# Allegro board CUITBIKE_V1.1_RF.brd
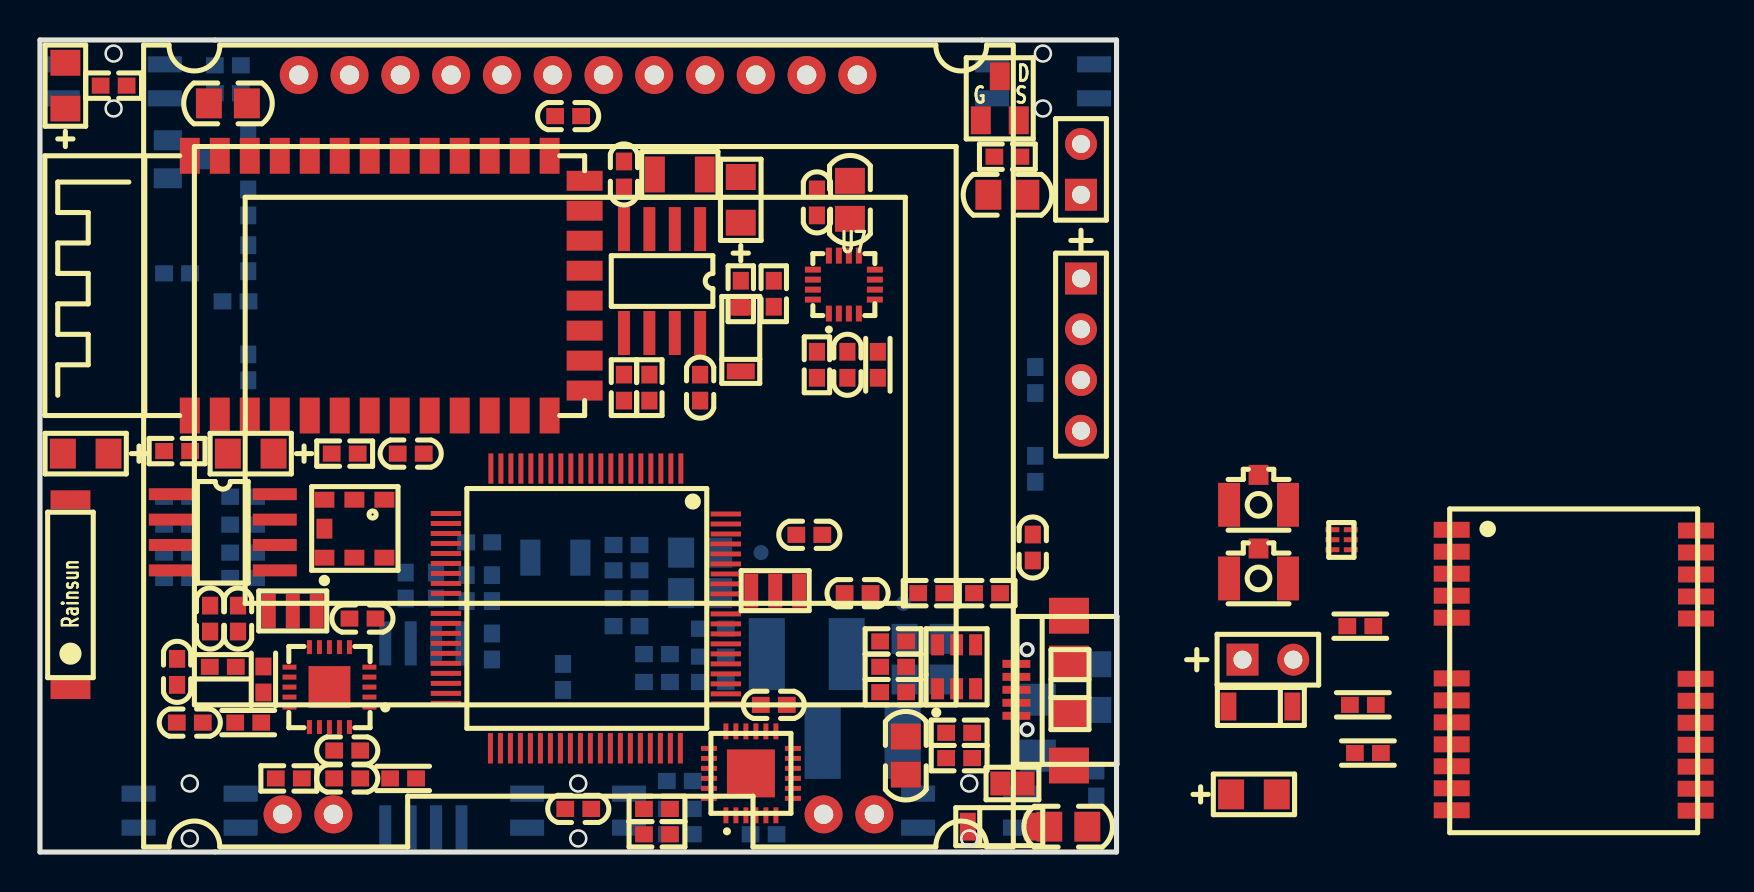
[diagram p0: board, top side]
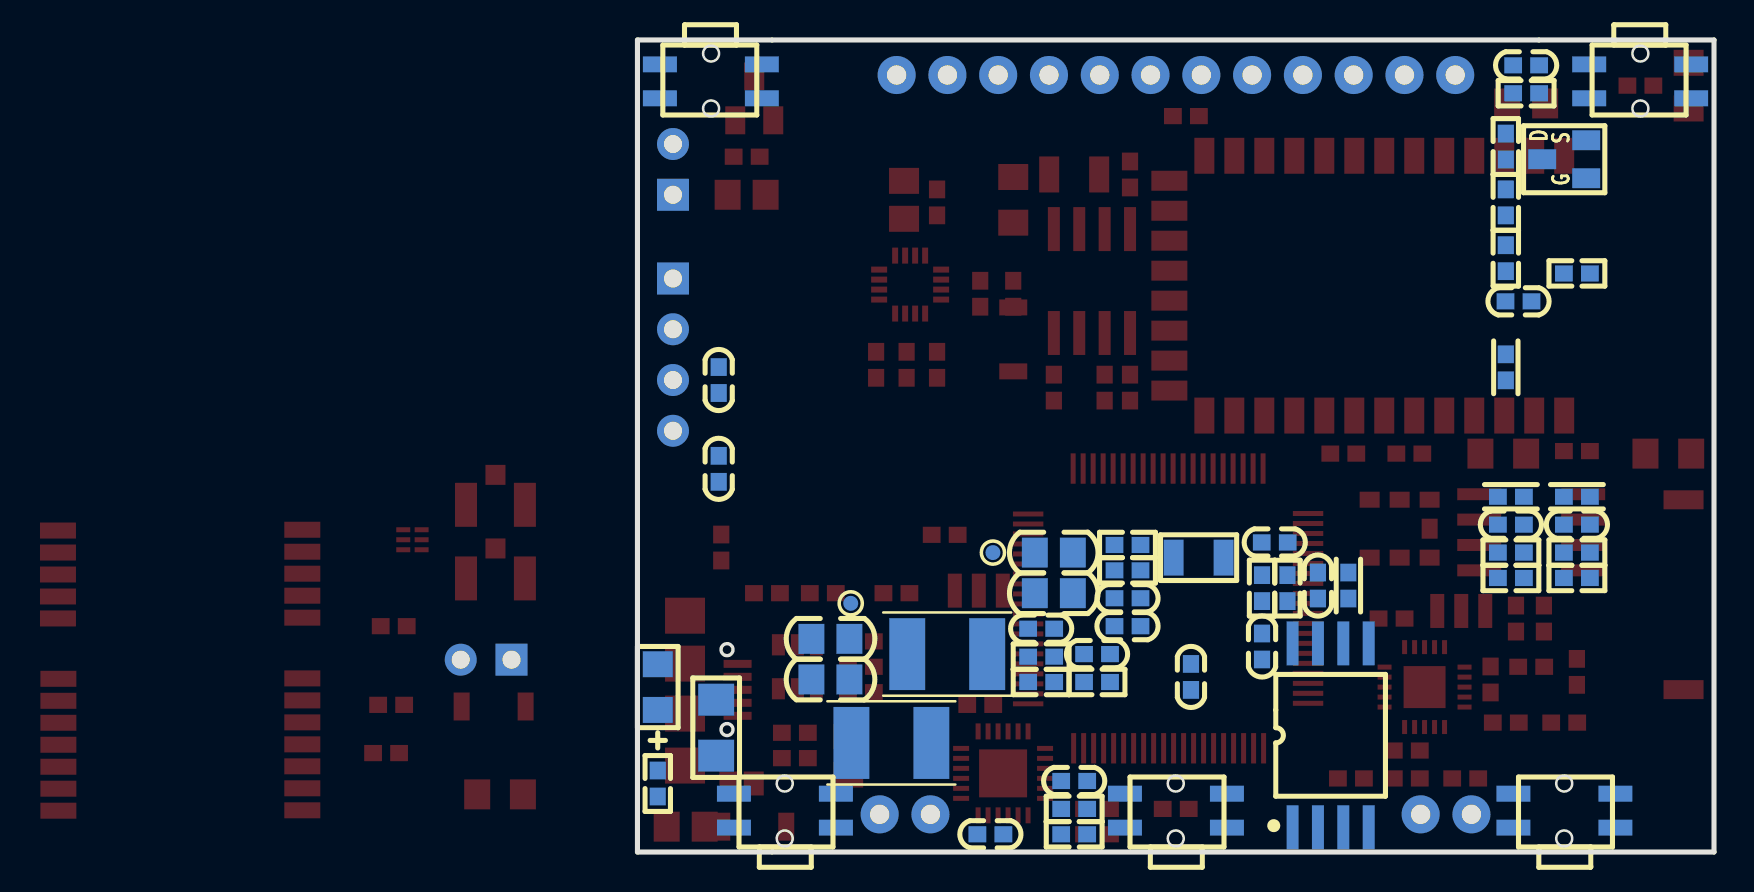
[diagram p1: board, bottom side, seen from below]

Outline 53.85 x 40.64 mm; copper layers: TOP, BOTTOM. Coordinates in mm from the lower left corner of the outline.
Outline path: 0,40.64 0,0 53.85,0 53.85,40.64 0,40.64

## Placement (name value [footprint] x y rotation side)
ANT1  -  [AN9520-245]  1.52 8.13 90 top
BAT1  -  [BATTERY]  52.07 32.89 90 top
BAT2  XH414  [BATTERY]  60.15 9.63 0 top
C1  10uF  [C0805]  51.44 1.27 180 top
C2  10uF  [C0805]  43.31 4.83 270 top
C3  0.1uF  [C0603]  36.7 7.37 180 top
C4  10pF  [C0603]  33.66 11.18 0 bottom
C5  10uF  [C0805]  33.02 12.95 0 bottom
C6  10uF  [C0805]  33.02 14.99 0 bottom
C7  0.1uF  [C0603]  36.2 0.89 180 bottom
C8  10pF  [C0603]  32 3.56 180 bottom
C9  10uF  [C0805]  44.2 10.67 180 bottom
C10  10uF  [C0805]  44.2 8.64 180 bottom
C11  10uF  [C0805]  48.39 32.89 0 top
C12  0.1uF  [C0603]  30.86 9.91 180 bottom
C13  1nF  [C0603]  9.4 39.37 180 bottom
C14  12pF  [C0603]  29.34 11.3 180 bottom
C15  12pF  [C0603]  29.34 12.7 180 bottom
C16  10uF  [C0603]  26.92 2.16 180 top
C17  0.1uF  [C0603]  22.61 10.29 90 bottom
C18  0.1uF  [C0603]  26.16 8.76 270 bottom
C19  0.1uF  [C0603]  21.97 15.49 0 bottom
C20  0.1uF  [C0603]  18.54 19.94 0 top
C21  0.1uF  [C0603]  33.02 23.24 270 top
C22  0.1uF  [C0603]  6.86 16.38 180 bottom
C23  12pF  [C0603]  29.21 33.91 270 top
C24  0.1uF  [C0603]  10.16 16.38 0 bottom
C25  0.1uF  [C0603]  15.37 3.68 0 top
C26  0.1uF  [C0603]  19.81 13.34 270 bottom
C27  0.1uF  [C0603]  15.37 5.08 180 top
C28  1.5pF  [C0603]  7.49 6.48 180 top
C29  1pF  [C0603]  6.86 9.02 90 top
C30  0.1uF  [C0603]  40.39 24.38 270 top
C31  10uF  [C0805]  40.51 32.64 90 top
C32  0.22uF  [C0603]  38.86 32.51 90 top
C33  0.1uF  [C0603]  16.13 11.68 0 top
C34  2.2nF  [C0603]  9.91 11.68 90 top
C35  4.7pF  [C0603]  8.51 11.68 90 top
C36  0.1uF  [C0603]  26.42 36.83 180 top
C37  10nF  [C0603]  49.78 19.18 90 bottom
C38  0.1uF  [C0603]  49.78 23.62 270 bottom
C39  8.2pF  [C0603]  38.48 15.88 0 top
C40  470pF  [C0603]  49.66 15.24 90 top
C41  0.1uF  [C0603]  40.89 12.95 180 top
C42  0.1uF  [C0603]  9.78 27.56 180 bottom
C43  22uF  [C0805]  9.4 37.47 0 top
D1  MBRM120  [SOD-123]  48.01 1.27 180 top
D2  MBRM120  [SOD-123]  35.05 25.65 270 top
D3  1N4148  [SOD-123]  61.04 7.28 0 top
F1  1.5A  [R1206]  49.91 6.22 270 bottom
IPX1  IPEX  [IPEX3]  60.95 13.69 0 top
IPX2  IPEX  [IPEX3]  60.95 17.38 0 top
J1  JUMP_2P  [JUMP-2P]  48.64 3.43 180 top
J2  CON4  [SIP-4-2R5]  52.07 28.7 270 top
L1  4.7uH  [L4532-P]  38.35 9.91 180 bottom
L2  4.7uH  [L4532-P]  41.15 5.46 0 bottom
L3  BEAD  [L0603]  10.16 17.78 0 bottom
L4  BEAD  [L0603]  6.86 17.78 180 bottom
L5  BEAD  [L0603]  18.16 3.68 180 top
L6  BEAD  [L0603]  18.29 13.34 90 bottom
L7  BEAD  [L0603]  41.91 24.38 90 top
L8  3.9nH  [L0603]  10.41 6.48 180 top
L9  8.2nH  [L0603]  11.18 8.64 90 top
L10  2.7nH  [L0603]  9.14 9.27 180 top
L11  27nH  [L0603]  10.41 24.26 90 bottom
L12  BEAD  [L0603]  66.42 4.95 0 top
L13  6.8nH  [L0603]  66.17 7.37 0 top
L14  27nH  [L0603]  66.04 11.3 0 top
LED1  LED-RED  [LED0805]  52.83 8.26 90 bottom
LED2  LED-RED  [LED0805]  2.29 19.94 180 top
LED3  LED-RED  [LED0805]  10.54 19.94 180 top
LED4  LED/NC  [LED0805]  35.05 32.64 90 top
LED5  LED-GREEN  [LED0805]  1.27 38.35 90 top
LED6  LED-GREEN  [LED0805]  60.72 2.88 0 top
Q1  SI2301  [SOT23-MOS]  48.01 37.72 0 top
Q2  SI2301  [SOT23-MOS]  7.49 34.67 90 bottom
R1  1M  [R0603]  30.86 2.16 0 top
R2  3.32K  [R0603]  52.83 3.43 90 bottom
R3  1.24K  [R0603]  45.97 4.7 180 top
R4  1.24K  [R0603]  45.97 5.97 0 top
R5  249k  [R0603]  33.66 9.78 180 bottom
R6  1.24K  [R0603]  30.86 0.89 180 top
R7  2.49M  [R0603]  48.39 34.8 180 top
R8  249k  [R0603]  32 2.16 0 bottom
R9  80.6K  [R0603]  33.66 8.51 180 bottom
R10  1K  [R0603]  42.67 9.27 0 top
R11  22R  [R0603]  42.67 8 180 top
R12  22R  [R0603]  42.67 10.54 180 top
R13  806K  [R0603]  32 0.89 180 bottom
R14  80.6K  [R0603]  30.86 8.51 180 bottom
R15  200K  [R0603]  29.34 15.37 0 bottom
R16  100K  [R0603]  29.34 14.1 180 bottom
R17  47K  [R0603]  9.4 37.97 180 bottom
R18  0R  [R0603]  22.61 13.21 90 bottom
R19  0R  [R0603]  21.34 13.21 90 bottom
R20  470R  [R0603]  6.86 20.07 180 top
R21  470R  [R0603]  15.24 19.94 180 top
R22  4.7K  [R0603]  10.16 13.72 0 bottom
R23  4.7K  [R0603]  10.16 14.99 0 bottom
R24  4.7K  [R0603]  6.86 14.99 0 bottom
R25  4.7K  [R0603]  6.86 13.72 0 bottom
R26  4.7K  [R0603]  30.48 23.24 90 top
R27  4.7K  [R0603]  29.21 23.24 90 top
R28  1K/NC  [R0603]  35.05 27.94 90 top
R29  4.7K  [R0603]  38.86 24.38 90 top
R30  4.7K  [R0603]  36.7 27.94 270 top
R31  22K  [R0603]  12.45 3.68 180 top
R32  10K  [R0603]  10.41 35.31 270 bottom
R33  100K  [R0603]  10.41 32.51 90 bottom
R34  510R  [R0603]  10.41 29.72 90 bottom
R35  10R  [R0603]  6.86 28.96 180 bottom
R36  470R  [R0603]  44.58 12.95 0 top
R37  100K  [R0603]  3.68 38.35 180 top
R38  10K  [R0603]  47.37 12.95 0 top
SW1  SW-4P-5R4x4R5  [SW-4P-5R4X4R5]  47.62 37.72 0 bottom
SW2  RESET  [SW-4P-5R4X4R5]  1.14 37.72 0 bottom
SW3  BACK  [SW-4P-5R4X4R5]  10.03 2.92 180 bottom
SW4  ENTER  [SW-4P-5R4X4R5]  29.46 2.92 180 bottom
SW5  MENU  [SW-4P-5R4X4R5]  49.02 2.92 180 bottom
TP1  TEST P  [TP-0R75]  36.07 14.99 180 bottom
TP2  TEST P  [TP-0R75]  43.18 12.45 180 bottom
U1  LTC3455  [QFN-24]  35.56 3.94 90 top
U2  USBLC6-2  [SOT23-6]  45.85 9.27 0 top
U3  MSP430F5529  [QFP-80]  27.3 12.19 270 top
U4  -  [BMP180]  15.75 16.13 90 top
U5  AT24Cxx  [SO-8-150]  9.14 16 270 top
U6  PCF8563  [SO-8-150]  31.11 28.57 180 top
U7  HMC5883L  [TQFN-3X3-16]  40.26 28.45 0 top
U8  W25Qxx  [SO-8-300]  19.18 5.84 180 bottom
U9  NRF24L01  [TQFN-4X4-20]  14.48 8.26 90 top
U10  -  [JLX12864G-086]  12.95 38.86 0 top
U11  -  [NEO-6M]  70.61 16.13 0 top
U12  -  [HC-06]  7.49 21.84 90 top
U13  MAX2659  [DFN-6]  64.64 16.13 0 top
USB1  -  [USB-MICRO]  48.77 8.13 90 top
X1  CSTCE-8M00  [X-3P-3R2X1R3-SMD]  37.97 13.08 180 top
X2  32.768K  [X-2P-3R2X1R5-SMD]  25.78 14.73 0 bottom
X3  32.768K  [X-2P-3R2X1R5-SMD]  32 33.91 0 top
X4  CSTCE-16M00  [X-3P-3R2X1R3-SMD]  13.84 12.06 180 top

## Library data of the parts
ANT1 = AN9520-245
BAT1 BAT2 = BATTERY
C1-C43 = CAP
D1 D2 = D SCHOTTKY
D3 = D DIODE
F1 = FUSE
IPX1 IPX2 = IPEX
J1 = JUMP_2P
J2 = CON4
L1-L14 = INDUCTOR
LED1-LED6 = LED
Q1 Q2 = MOS P
R1-R38 = RES1
SW1-SW5 = SWITCH-SPST-4P
TP1 TP2 = TEST P
U1 = LTC3455
U2 = USBLC6-2
U3 = MSP430F5529
U4 = BMP180
U5 = AT24Cxx
U6 = PCF8563
U7 = HMC5883
U8 = W25Qxx
U9 = NRF24L01
U10 = JLX12864G-086
U11 = NEO-6M
U12 = HC-06
U13 = MAX2659
USB1 = USB-MINI
X1 X4 = CSTCE-8M00
X2 X3 = XTAL

## Footprints (pads in the part's own frame, mm; a bottom-side part is the same pattern mirrored in y, then rotated)
AN9520-245
  rect 0.95x2 smd: 1(0,0) 2(9.5,0)
BATTERY
  rect 1.6x1.6 hole 0.9: 1(0,0)
  round 1.6 hole 0.9: 2(2.54,0)
BMP180
  rect 0.8x1 smd: 1(-1.397,1.524) 2(-1.397,0.024) 3(-1.397,-1.476) 4(1.503,-1.476) 5(1.503,0.024) 6(1.503,1.524)
  rect 1x0.8 smd: 7(0.053,1.524)
C0603
  rect 0.89x0.81 smd: 1(-0.65,0) 2(0.65,0)
C0805
  rect 1.3x1.5 smd: 1(-0.95,0) 2(0.95,0)
DFN-6
  rect 0.7x0.25 smd: 1(0,0) 2(0,-0.5) 3(0,-1) 4(0.92,-1) 5(0.92,-0.5) 6(0.92,0)
HC-06
  rect 1.8x1 smd: 1(0,0) 2(0,-1.5) 3(0,-3) 4(0,-4.5) 5(0,-6) 6(0,-7.5) 7(0,-9) 8(0,-10.5) 9(0,-12) 10(0,-13.5) 11(0,-15) 12(0,-16.5) 13(0,-18) 22(13,-18) 23(13,-16.5) 24(13,-15) 25(13,-13.5) 26(13,-12) 27(13,-10.5) 28(13,-9) 29(13,-7.5) 30(13,-6) 31(13,-4.5) 32(13,-3) 33(13,-1.5) 34(13,0)
  rect 1x1.8 smd: 14(1.25,-19.75) 15(2.75,-19.75) 16(4.25,-19.75) 17(5.75,-19.75) 18(7.25,-19.75) 19(8.75,-19.75) 20(10.25,-19.75) 21(11.75,-19.75)
IPEX3
  rect 1x1 smd: 1(0,1.499)
  rect 1.1x2.2 smd: 2(-1.473,0) 3(1.473,0)
JLX12864G-086
  round 1.905 hole 0.965: 1(27.93,0.024) 2(25.39,0.024) 3(22.85,0.024) 4(20.31,0.024) 5(17.77,0.024) 6(15.23,0.024) 7(12.69,0.024) 8(10.15,0.024) 9(7.61,0.024) 10(5.07,0.024) 11(2.53,0.024) 12(-0.01,0.024) 13(-0.82,-36.976) 14(1.72,-36.976) 15(26.24,-36.976) 16(28.78,-36.976)
JUMP-2P
  rect 1x1.2 smd: 1(-0.61,0) 2(0.61,0)
L0603
  rect 0.89x0.81 smd: 1(-0.65,0) 2(0.65,0)
L4532-P
  rect 1.8x3.6 smd: 1(-2,0) 2(2,0)
LED0805
  rect 1.3x1.5 smd: 1(-1.143,0) 2(1.143,0)
NEO-6M
  rect 1.8x0.8 smd: 1(0,0) 2(0,-1.1) 3(0,-2.2) 4(0,-3.3) 5(0,-4.4) 6(0,-7.44) 7(0,-8.54) 8(0,-9.64) 9(0,-10.74) 10(0,-11.84) 11(0,-12.94) 12(0,-14.04) 13(12.2,-14.06) 14(12.2,-12.96) 15(12.2,-11.86) 16(12.2,-10.76) 17(12.2,-9.66) 18(12.2,-8.56) 19(12.2,-7.46) 20(12.22,-4.44) 21(12.22,-3.34) 22(12.22,-2.24) 23(12.22,-1.14) 24(12.22,-0.04)
QFN-24
  rect 0.8x0.25 smd: 1(-2.1,1.25) 2(-2.1,0.75) 3(-2.1,0.25) 4(-2.1,-0.25) 5(-2.1,-0.75) 6(-2.1,-1.25) 13(2.1,-1.25) 14(2.1,-0.75) 15(2.1,-0.25) 16(2.1,0.25) 17(2.1,0.75) 18(2.1,1.25)
  rect 0.25x0.8 smd: 7(-1.25,-2.1) 8(-0.75,-2.1) 9(-0.25,-2.1) 10(0.25,-2.1) 11(0.75,-2.1) 12(1.25,-2.1) 19(1.25,2.1) 20(0.75,2.1) 21(0.25,2.1) 22(-0.25,2.1) 23(-0.75,2.1) 24(-1.25,2.1)
  rect 2.4x2.4 smd: 25(0,0)
QFP-80
  rect 1.52x0.25 smd: 1(-7,4.75) 2(-7,4.25) 3(-7,3.75) 4(-7,3.25) 5(-7,2.75) 6(-7,2.25) 7(-7,1.75) 8(-7,1.25) 9(-7,0.75) 10(-7,0.25) 11(-7,-0.25) 12(-7,-0.75) 13(-7,-1.25) 14(-7,-1.75) 15(-7,-2.25) 16(-7,-2.75) 17(-7,-3.25) 18(-7,-3.75) 19(-7,-4.25) 20(-7,-4.75) 41(7,-4.775) 42(7,-4.275) 43(7,-3.775) 44(7,-3.275) 45(7,-2.775) 46(7,-2.275) 47(7,-1.775) 48(7,-1.275) 49(7,-0.775) 50(7,-0.275) 51(7,0.225) 52(7,0.725) 53(7,1.225) 54(7,1.725) 55(7,2.225) 56(7,2.725) 57(7,3.225) 58(7,3.725) 59(7,4.225) 60(7,4.725)
  rect 0.25x1.52 smd: 21(-4.75,-7) 22(-4.25,-7) 23(-3.75,-7) 24(-3.25,-7) 25(-2.75,-7) 26(-2.25,-7) 27(-1.75,-7) 28(-1.25,-7) 29(-0.75,-7) 30(-0.25,-7) 31(0.25,-7) 32(0.75,-7) 33(1.25,-7) 34(1.75,-7) 35(2.25,-7) 36(2.75,-7) 37(3.25,-7) 38(3.75,-7) 39(4.25,-7) 40(4.75,-7) 61(4.775,7) 62(4.275,7) 63(3.775,7) 64(3.275,7) 65(2.775,7) 66(2.275,7) 67(1.775,7) 68(1.275,7) 69(0.775,7) 70(0.275,7) 71(-0.225,7) 72(-0.725,7) 73(-1.225,7) 74(-1.725,7) 75(-2.225,7) 76(-2.725,7) 77(-3.225,7) 78(-3.725,7) 79(-4.225,7) 80(-4.725,7)
R0603
  rect 0.89x0.81 smd: 1(-0.65,0) 2(0.65,0)
R1206
  rect 1.6x1.8 smd: 1(-1.4,0) 2(1.4,0)
SIP-4-2R5
  rect 1.6x1.6 hole 0.9: 1(0,0)
  round 1.6 hole 0.9: 2(2.54,0) 3(5.08,0) 4(7.62,0)
SO-8-150
  rect 0.6x2.2 smd: 1(-1.905,-2.6) 2(-0.635,-2.6) 3(0.635,-2.6) 4(1.905,-2.6) 5(1.905,2.6) 6(0.635,2.6) 7(-0.635,2.6) 8(-1.905,2.6)
SO-8-300
  rect 0.6x2.2 smd: 1(-1.905,-4.6) 2(-0.635,-4.6) 3(0.635,-4.6) 4(1.905,-4.6) 5(1.905,4.6) 6(0.635,4.6) 7(-0.635,4.6) 8(-1.905,4.6)
SOD-123
  rect 0.8x1.4 smd: 1(-1.6,0) 2(1.6,0)
SOT23-6
  rect 0.65x1.06 smd: 1(-0.95,-1.1) 2(0,-1.1) 3(0.95,-1.1) 4(0.95,1.1) 5(0,1.1) 6(-0.95,1.1)
SOT23-MOS
  rect 1x1.4 smd: 1(-0.95,-1.1) 2(0.95,-1.1) 3(0,1.1)
SW-4P-5R4X4R5
  rect 1.7x0.8 smd: 1(0,0) 2(5.1,0) 3(0,-1.7) 4(5.1,-1.7)
TP-0R75
  round 0.75 smd: 1(0,0)
TQFN-3X3-16
  rect 0.3x0.8 smd: 1(-0.8,-1.5) 2(-0.3,-1.5) 3(0.2,-1.5) 4(0.7,-1.5) 9(0.7,1.4) 10(0.2,1.4) 11(-0.3,1.4) 12(-0.8,1.4)
  rect 0.8x0.3 smd: 5(1.5,-0.8) 6(1.5,-0.3) 7(1.5,0.2) 8(1.5,0.7) 13(-1.6,0.7) 14(-1.6,0.2) 15(-1.6,-0.3) 16(-1.6,-0.8)
TQFN-4X4-20
  rect 0.25x0.7 smd: 1(-1,-2) 2(-0.5,-2) 3(0,-2) 4(0.5,-2) 5(1,-2) 11(1,2) 12(0.5,2) 13(0,2) 14(-0.5,2) 15(-1,2)
  rect 0.7x0.25 smd: 6(2,-1) 7(2,-0.5) 8(2,0) 9(2,0.5) 10(2,1) 16(-2,1) 17(-2,0.5) 18(-2,0) 19(-2,-0.5) 20(-2,-1)
  rect 2.1x2.1 smd: 21(0,0)
USB-MICRO
  rect 0.4x1.4 smd: 1(-1.31,-0.07) 2(-0.66,-0.07) 3(-0.01,-0.07) 4(0.64,-0.07) 5(1.29,-0.07)
  rect 1.8x2 smd: 6(-3.8,-2.7) 7(-1.2,-2.7) 8(1.3,-2.7) 9(3.7,-2.7)
X-2P-3R2X1R5-SMD
  rect 1x1.8 smd: 1(-1.25,0) 2(1.25,0)
X-3P-3R2X1R3-SMD
  rect 0.7x1.7 smd: 1(0,0) 2(1.2,0) 3(2.4,0)

## Nets
GND: BAT1.2 BAT2.2 C1.1 C2.1 C3.1 C5.1 C6.1 C7.1 C9.1 C10.1 C11.1 C12.2 C13.1 C14.1 C15.1 C16.1 C17.1 C18.1 C20.1 C21.2 C22.2 C23.1 C24.2 C25.1 C26.1 C27.2 C29.2 C30.2 C31.2 C33.2 C34.2 C35.2 C36.1 C37.1 C38.1 C41.2 C42.2 C43.1 IPX1.2 IPX1.3 IPX2.2 IPX2.3 J2.2 LED2.2 LED3.2 LED4.2 LED6.2 R4.2 R6.2 R9.2 R13.2 R14.2 R16.2 R19.1 R31.2 R33.2 R37.1 SW1.3 SW1.4 SW2.3 SW2.4 SW3.3 SW3.4 SW4.3 SW4.4 SW5.3 SW5.4 U1.6(SUSPEND) U1.25(GND) U2.2(GND) U3.14(AVSS1) U3.49(DVSS2) U3.61(VSSU) U3.68(AVSS2) U4.7(GND) U5.1(A0) U5.2(A1) U5.3(A2) U5.4(GND) U5.7(WP) U6.4(VSS) U7.9(GND_1) U7.11(GND_2) U8.4(GND) U9.8(VSS_1) U9.14(VSS_2) U9.17(VSS_3) U9.20(VSS_4) U9.21(GND) U10.6(VSS) U10.13(NC_4) U10.14(NC_3) U10.15(NC_2) U10.16(NC_1) U11.7(VDDUSB) U11.10(GND_1) U11.12(GND_2) U11.13(GND_3) U11.24(GND_4) U12.13(GND_1) U12.21(GND_2) U12.22(GND_3) U13.1(GND_1) U13.2(GND_2) USB1.5(GND) USB1.6(S1) USB1.7(S2) USB1.8(S3) USB1.9(S4) X1.2 X4.2
VBUS: C1.2 D1.1 F1.2 J1.1 R2.1 U2.5(VCC) U3.65(VBUS)
VCC1_3V3: C8.2 C9.2 C10.2 C16.2 C17.2 C18.2 C21.1 D2.2 J2.1 L2.2 L3.2 L4.2 L5.1 L6.2 L7.1 R1.1 R8.1 R17.1 R18.1 R26.1 R27.1 TP2.1 U3.11(AVCC1) U3.50(DVCC2) U6.8(VDD)
VCC2_3V3: C4.2 C5.2 C6.2 C36.2 C38.2 D3.1 L1.2 L14.2 Q1.3 Q2.2 R5.1 R34.2 TP1.1 U1.13(HSI) U10.7(VDD) U11.23(VCC)
VCC_5529LDO: U3.66(VUSB)
VCC_BAT: BAT1.1 C11.2 R7.1 R15.1 U1.9(VBAT)
3455_HSON: U1.15(HSON) U3.59(P7.6/TB0.4)
3455_MODE: U1.21(MODE) U3.58(P7.5/TB0.3)
3455_ON2: U1.19(ON2) U3.60(P7.7/TB0CLK/MCLK)
3455_PBSTAT: R1.2 U1.23(PBSTAT) U3.33(P2.4/TA2.1)
3455_PWRON: U1.22(PWRON) U3.15(P8.0)
12864_CS: U3.3(P6.6/CB6/A6) U10.12(CS)
12864_EN: R32.1 U3.4(P6.7/CB7/A7)
12864_RESET: U3.2(P6.5/CB5/A5) U10.11(RESET)
12864_ROM_CS: U3.51(P4.4/PM_UCA1TXD/PM_UCA1SIMO) U10.4(ROM_CS) U11.21(RXD1)
12864_ROM_IN: U3.46(P4.1/PM_UCB1SIMO/PM_UCB1SDA) U10.1(ROM_IN)
12864_ROM_OUT: U3.47(P4.2/PM_UCB1SOMI/PM_UCB1SCL) U10.2(ROM_OUT)
12864_ROM_SCK: U3.48(P4.3/PM_UCB1CLK/PM_UCA1STE) U10.3(ROM_SCK)
12864_RS: U3.1(P6.4/CB4/A4) U10.10(RS)
12864_SCL: U3.79(P6.2/CB2/A2) U10.8(SCLK)
12864_SDA: U3.80(P6.3/CB3/A3) U10.9(SDA)
/RST: C13.2 J2.4 R17.2 SW2.1 SW2.2 U3.76(R\S\T\/NMI/SBWTDIO)
ADC_BAT: R15.2 R16.1 U3.77(P6.0/CB0/A1)
AT24CXX_SCL: R24.2 U3.27(P1.6/TA1CLK/CBOUT) U5.6(SCL)
AT24CXX_SDA: R25.2 U3.26(P1.5/TA0.4) U5.5(SDA)
BMP180_SCL: R23.2 U3.24(P1.3/TA0.2) U4.5(SCL)
BMP180_SDA: R22.2 U3.25(P1.4/TA0.3) U4.6(SDA)
BT_EN: R38.2 U3.42(P3.5/TB0.5)
BT_RXD: U3.40(P3.3/UCA0TXD/UCA0SIMO) U12.2(UART_RXD)
BT_TXD: U3.41(P3.4/UCA0RXD/UCA0SOMI) U12.1(UART_TXD)
GPS_TXD: U3.52(P4.5/PM_UCA1RXD/PM_UCA1SOMI) U11.20(TXD1)
HMC5883L_SCL: R29.2 U3.31(P2.2/TA2CLK/SMCLK) U7.1(SCL)
HMC5883L_SDA: R30.2 U3.32(P2.3/TA2.0) U7.16(SDA)
NRF24L01_CE: U3.35(P2.6/RTCCLK/DMAE0) U9.1(CE)
NRF24L01_CSN: U3.36(P2.7/UCB0STE/UCA0CLK) U9.2(CSN)
NRF24L01_IRQ: U3.34(P2.5/TA2.2) U9.6(IRQ)
NRF24L01_MISO: U3.38(P3.1/UCB0SOMI/UCB0SCL) U9.5(MISO)
NRF24L01_MOSI: U3.37(P3.0/UCB0SIMO/UCB0SDA) U9.4(MOSI)
NRF24L01_SCK: U3.39(P3.2/UCB0CLK/UCA0STE) U9.3(SCK)
P1.0: SW3.1 SW3.2 U3.21(P1.0/TA0CLK/ACLK)
P1.1: SW4.1 SW4.2 U3.22(P1.1/TA0.0)
P1.2: SW5.1 SW5.2 U3.23(P1.2/TA0.1)
P4.0: U3.45(P4.0/PM_UCB1STE/PM_UCA1CLK)
P4.6: U3.53(P4.6/PM_NONE)
P4.7: U3.54(P4.7/PM_NONE)
P5.6: U3.55(P5.6/TB0.0)
P5.7: U3.56(P5.7/TB0.1)
P6.1: U3.78(P6.1/CB1/A1)
P7.4: U3.57(P7.4/TB0.2)
P8.1: R20.1 U3.16(P8.1)
P8.2: R21.1 U3.17(P8.2)
PCF8563_INT: U3.28(P1.7/TA1.0) U6.3(I\N\T\)
PCF8563_SCL: R26.2 U3.29(P2.0/TA1.1) U6.6(SCL)
PCF8563_SDA: R27.2 U3.30(P2.1/TA1.2) U6.5(SDA)
TEST: J2.3 U3.71(TEST/SBWTCK)
USB_DN: R12.2 U3.64(PU.1/DM)
USB_DP: R11.2 U3.62(PU.0/DP)
USB_PUR: R10.1 U3.63(PUR)
VMAX: C2.2 D1.2 R3.1 U1.10(VMAX)
W25QXX_CS: U3.6(P7.1/CB9/A13) U8.1(C\S\)
W25QXX_SPI_CLK: U3.5(P7.0/CB8/A12) U8.6(CLK)
W25QXX_SPI_MISO: U3.7(P7.2/CB10/A14) U8.2(DO)
W25QXX_SPI_MOSI: U3.8(P7.3/CB11/A15) U8.5(DI)
N11600: C24.1 L3.1 R22.1 R23.1 U4.2(VDD) U4.3(VDDIO)
N12321: C22.1 L4.1 R24.1 R25.1 U5.8(VCC)
N13413: C26.2 L6.1 U8.3(W\P\) U8.7(H\O\L\D\) U8.8(VCC)
N14951: C32.2 U7.8(SETP)
N14958: C32.1 U7.12(SETC)
N15151: C31.1 U7.10(C1)
N15523: C30.1 L7.2 R29.1 R30.1 U7.2(VDD) U7.4(S1) U7.13(VDDIO)
N16975: U6.1(OSCI) X3.2
N16982: C23.2 U6.2(OSCO) X3.1
N18867: LED4.1 R28.2
N18881: R28.1 U6.7(CLKOUT)
N20495: R31.1 U9.16(IREF)
N20883: U9.9(XC2) X4.1
N20890: U9.10(XC1) X4.3
N21363: C25.2 C27.1 C33.1 L5.2 U9.7(VDD_1) U9.15(VDD_2) U9.18(VDD_3) U9.19(DVDD)
N22760: L8.1 L9.1 U9.13(ANT2)
N22769: L9.2 L10.1 U9.12(ANT1)
N22838: C34.1 C35.1 L10.2 U9.11(VDD_PA)
N23293: ANT1.1 C28.2 C29.1
N35776: C41.1 L12.2 U12.12(3.3V)
N35796: R36.1 U12.24(PIO1)
N35854: LED6.1 R36.2
N49264: C15.2 U3.12(P5.4/XIN) X2.2
N49268: C14.2 U3.13(P5.5/XOUT) X2.1
N49336: C20.2 U3.20(VCORE)
N50226: U3.70(P5.3/XT2OUT) X1.3
N50230: U3.69(P5.2/XT2IN) X1.1
N50234: C12.1 U3.67(V18)
N51487: C19.1 R19.2 U3.19(DVSS1)
N51523: C19.2 R18.2 U3.18(DVCC1)
N65101: Q2.1 R37.2 R38.1
N66864: C37.2 Q1.1 R32.2 R33.1
N136815: R35.1 U11.8(NC_2) U11.9(VCC_RF)
N137490: C39.1 IPX1.1 L11.1 U11.11(RF_IN)
N137558: C39.2 U13.6(RFOUT)
N137565: C42.1 L14.1 U13.4(VCC) U13.5(S\H\D\N\)
N138671: C43.2 D3.2 U11.22(V_BCKP)
N141719: LED5.2 U11.3(TIMEPULSE)
N173353: R7.2 R13.1 U1.16(AI)
N173581: R2.2 R4.1 U1.11(WALLFB)
N173653: R10.2 R11.1 U2.4(IO2_O)
N173707: C7.2 U1.3(TIMER)
N173743: R6.1 U1.2(PROG)
N173847: J1.2 U1.5(USBHP) U1.8(USB)
N173883: C4.1 R5.2 R9.1 U1.18(FB2)
N173931: LED1.2 U1.4(C\H\R\G\)
N173943: LED1.1 R3.2
N173969: U2.1(IO1_I) USB1.2(D-)
N173973: U2.3(IO2_I) USB1.3(D+)
N174029: R12.1 U2.6(IO1_O)
N174157: SW1.1 SW1.2 U1.24(O\N\)
N174185: L1.1 U1.12(SW2)
N174205: L2.1 U1.7(SW1)
N174389: C8.1 R8.2 R14.1 U1.1(FB1)
N174663: C3.2 U1.14(HSO)
N176009: Q1.2 U10.5(LEDA)
N178527: BAT2.1 D2.1
N227281: C28.1 L8.2
N403830: L12.1 Q2.3
N640780: LED2.1 R20.2
N641980: LED3.1 R21.2
N1367472: L13.2 U13.3(RFIN)
N1367731: L11.2 R35.2
N1379900: C40.2 L13.1
N1380680: C40.1 IPX2.1
N1416060: LED5.1 R34.1
N1734530: F1.1 USB1.1(VBUS)

Pads without a net: ANT1 2; U1 17 20; U3 9 10 43 44 72 73 74 75; U4 1 4; U7 3 5 6 7 14 15; U11 1 2 4 5 6 14 15 16 17 18 19; U12 3 4 5 6 7 8 9 10 11 14 15 16 17 18 19 20 23 25 26 27 28 29 30 31 32 33 34; USB1 4
